# Altium PCB TesisCircuit.PcbDoc
Units mm, origin at the board's own origin, x right, y up, seen from the top; angles counter-clockwise.
Board outline 46.96 x 56.67 mm, 2 copper layers (Top Layer, Bottom Layer); 46 components, 31 nets, 198 pads, 18 vias.
Unrouted connection lines stored in the file: 3.
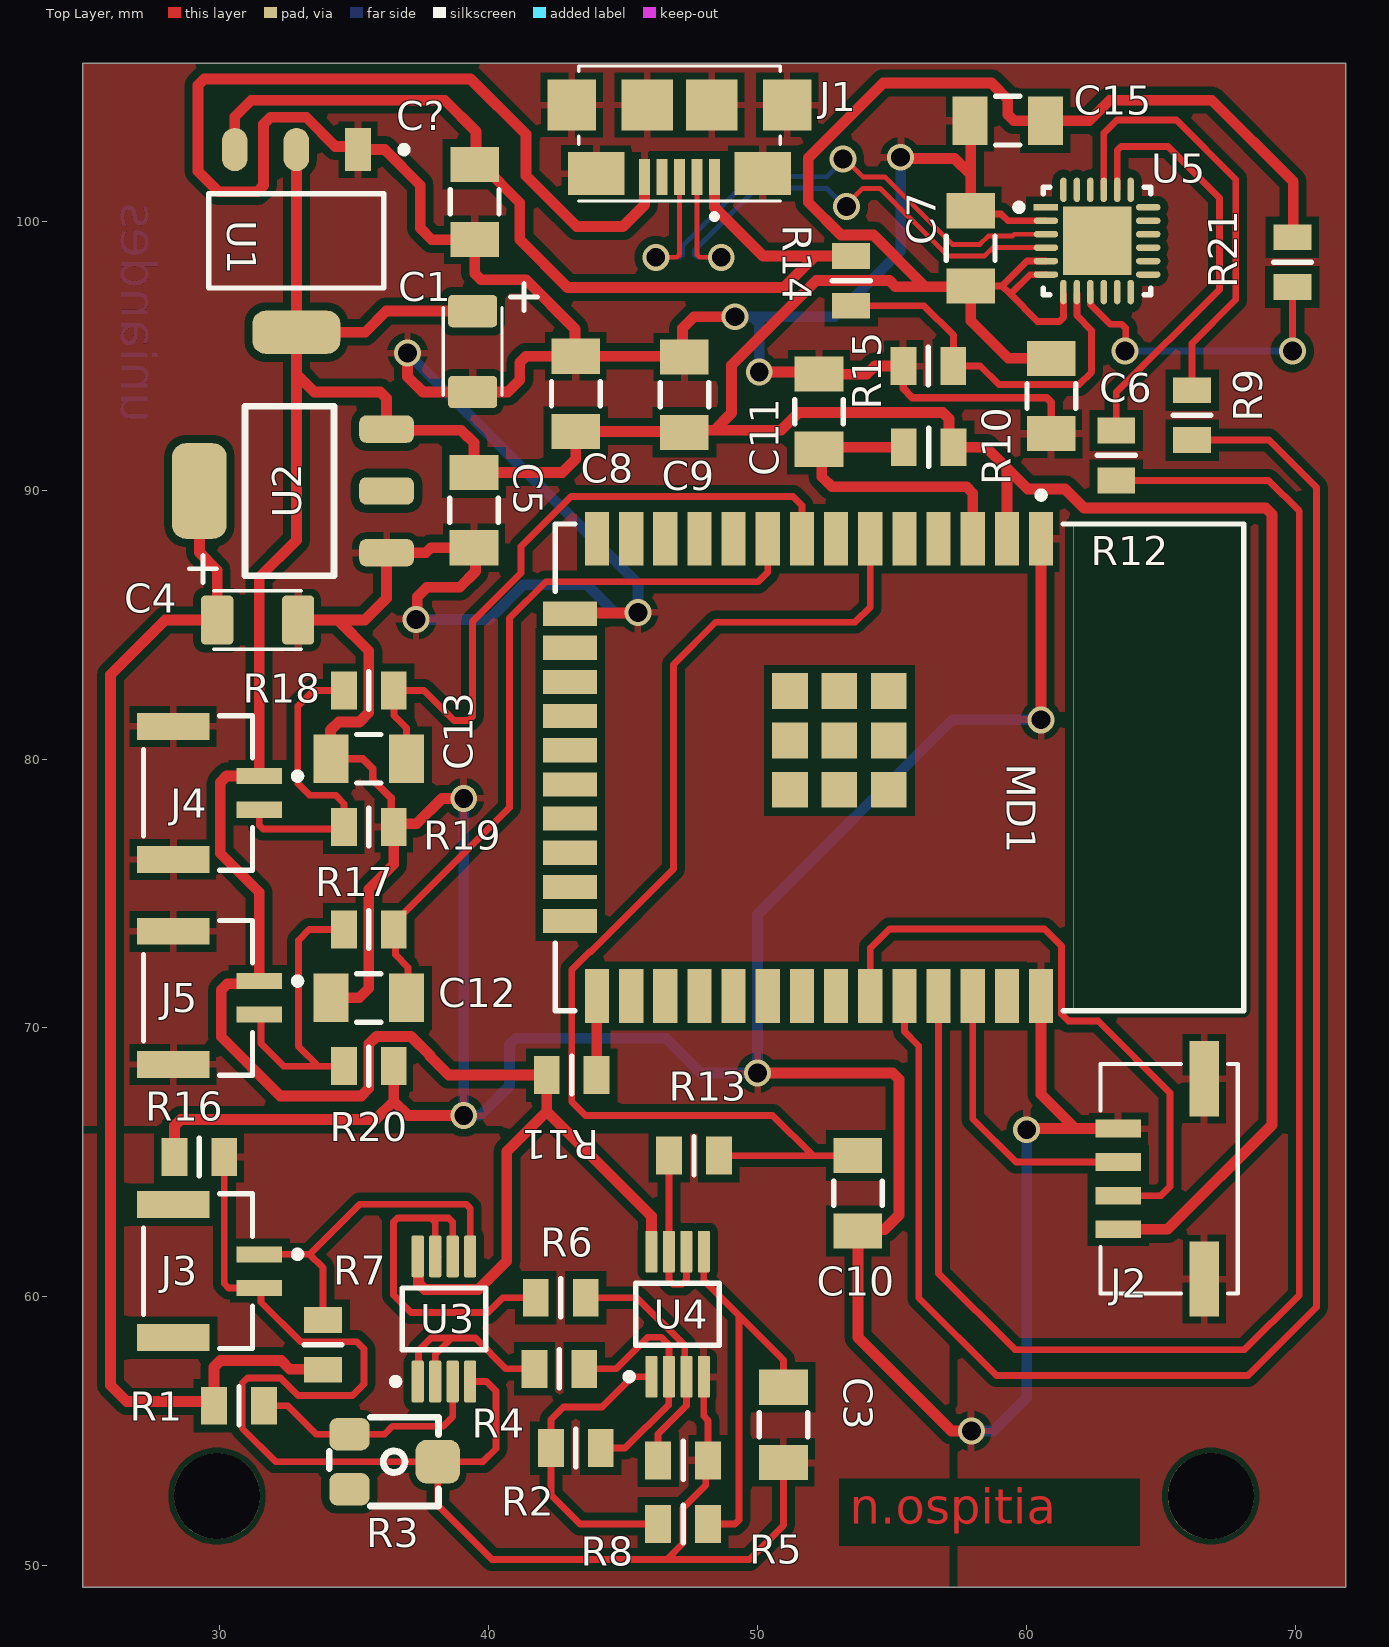
[diagram p0: Top Layer view]
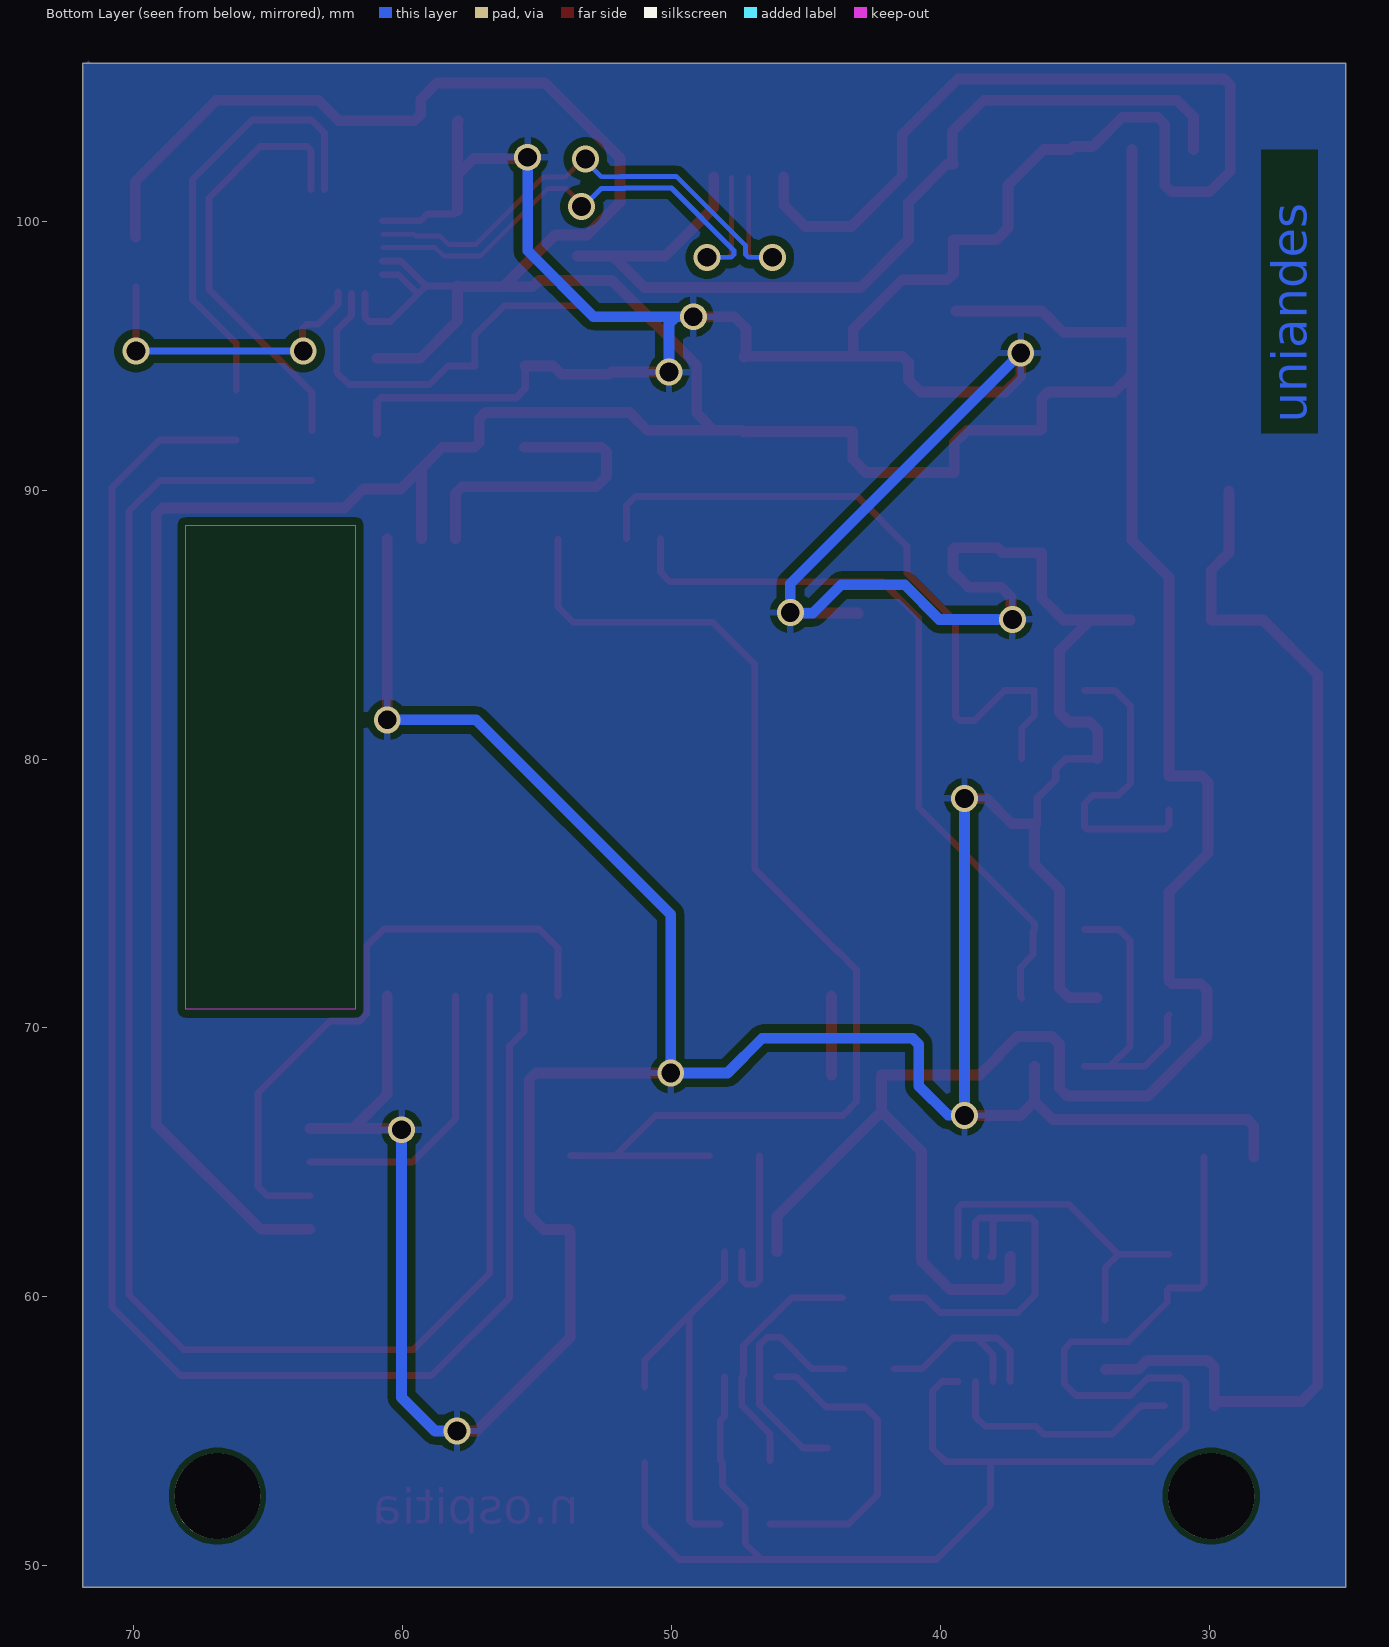
[diagram p1: Bottom Layer view, seen from below]
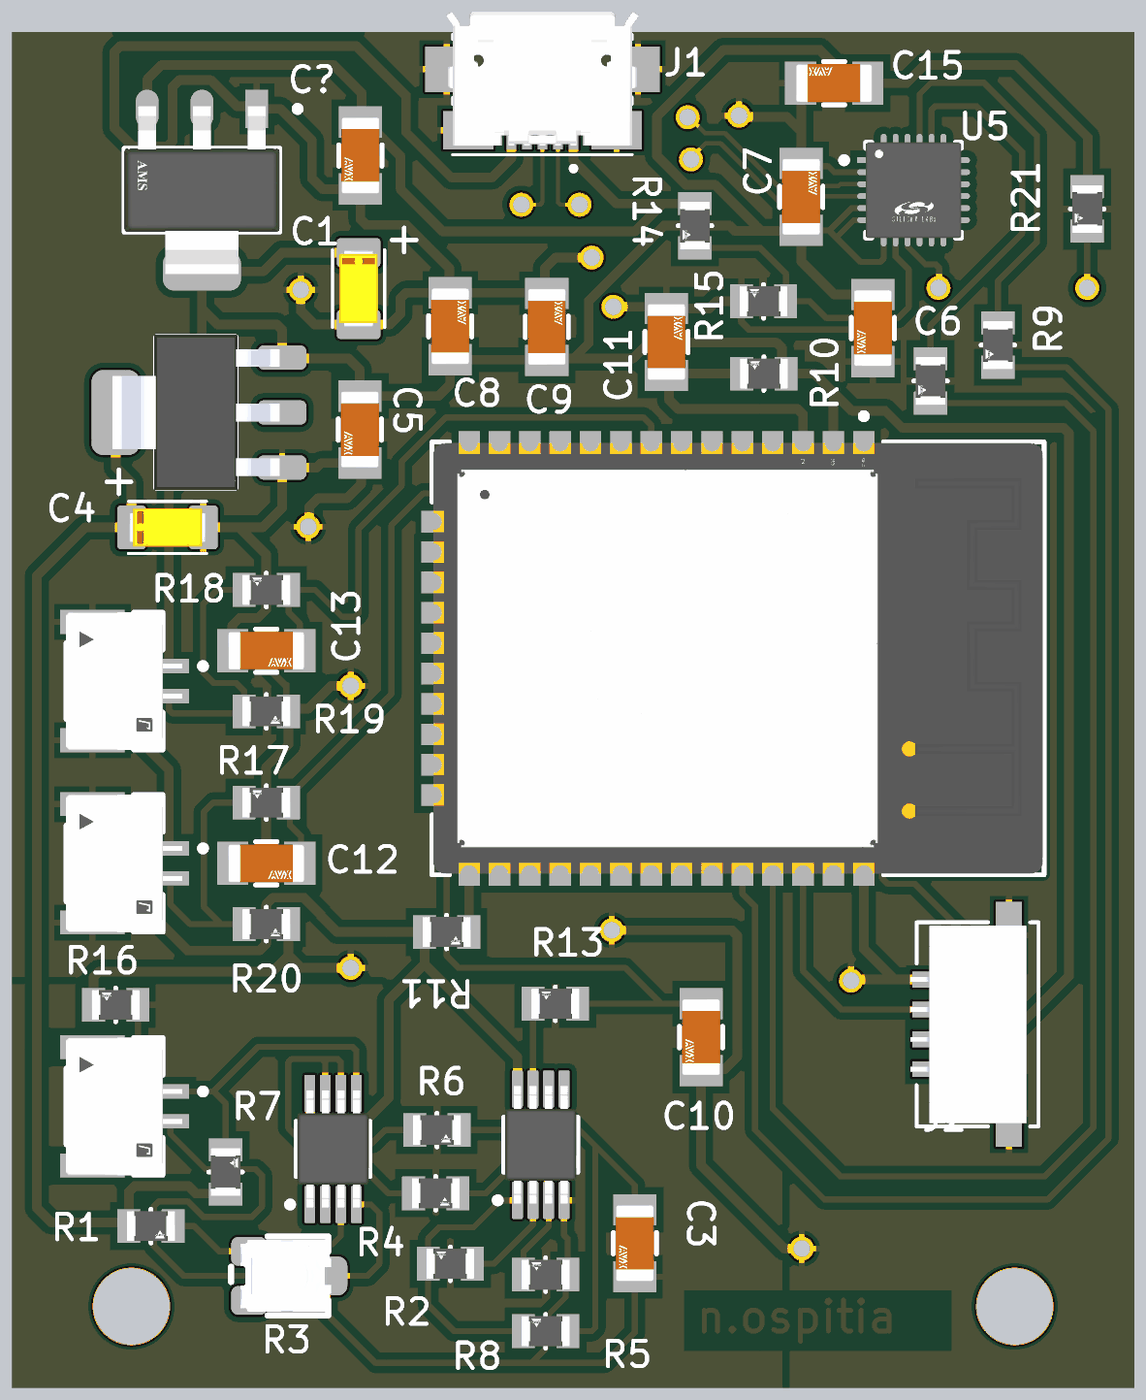
[diagram p2: 3D render of the assembled board from above, using the file's embedded part models]

## Layer stack, top to bottom
Top Solder: solder mask 0.0102, Solder Resist, Dk 3.5
Top Layer: signal copper 0.0356
Dielectric 1: dielectric 0.32, FR-4, Dk 4.8
Bottom Layer: signal copper 0.0356
Bottom Solder: solder mask 0.0102, Solder Resist, Dk 3.5

## Board outline
24.917,49.2 71.882,49.2 71.882,105.867 24.917,105.867

## Design rules (kind name [scope] priority, off if disabled: settings)
Clearance [All] p1: gap=0.2 ignorepadtopadclearanceinfootprint=TRUE except(0.1: Arc-SMDPad Track-SMDPad; 0.15: Arc-Arc Arc-Track Track-Track SMDPad-SMDPad)
DiffPairsRouting [All] p1: maxlimit=0.254 minlimit=0.18 mostfreqgap=0.254 toplayer_minwidth=0.18 toplayer_maxwidth=0.381 toplayer_prefwidth=0.18 bottomlayer_minwidth=0.18 bottomlayer_maxwidth=0.381 bottomlayer_prefwidth=0.18 maxuncoupledlength=12.7
PolygonConnect [All] p1: connectstyle=Relief reliefconductorwidth=0.254 reliefentries=4 polygonreliefangle="90 Angle" airgapwidth=0.254
RoutingVias [All] p1: holewidth=0.711 width=1.27 viastyle="Through Hole" minholewidth=0.15 minwidth=0.5 maxholewidth=0.711 maxwidth=1.27
SolderMaskExpansion [All] p1: expansion=0.102 istentingtop=FALSE
SupplyNets "Schematic Supply Nets_7" [InNet('VDD1.8')] p1: voltage=0.000
SupplyNets "Schematic Supply Nets_6" [InNet('FSR2')] p2: voltage=0.000
SupplyNets "Schematic Supply Nets_5" [InNet('VDD5')] p3: voltage=0.000
SupplyNets "Schematic Supply Nets_4" [InNet('FSR1')] p4: voltage=0.000
SupplyNets "Schematic Supply Nets_3" [InNet('GND')] p5: voltage=0.000
SupplyNets "Schematic Supply Nets_2" [InNet('ANALOG_GND')] p6: voltage=0.000
SupplyNets "Schematic Supply Nets_1" [InNet('VDD3.3')] p7: voltage=0.000
SupplyNets "Schematic Supply Nets" [InNet('EDA+')] p8: voltage=0.000
Width [All] p1: maxlimit=0.4 minlimit=0.18 preferedwidth=0.254
29 further rules are at their usual default settings.

## Classes and differential pairs
differential pair D-/+: +D-/+_P -D-/+_N

## Components (designator, comment, footprint, x,y, rotation, side; value= is the part's Value field where it differs from the comment)
C1 "16V 10uF" "Tantalum Capacitor SMD" 39.421,95.148 r270 top
C3 "0.1uF 10V" FP-1206Q-IPC_B 50.978,55.241 r270 top
C4 "16V 10uF" "Tantalum Capacitor SMD" 31.426,85.166 r0 top
C5 "10uF 10V" FP-1206Q-IPC_B 39.472,89.256 r270 top
C6 "4.7uF 10V" FP-1206Q-IPC_B 60.935,93.497 r270 top
C7 "0.1uF 10V" FP-1206Q-IPC_B 57.937,98.984 r90 top
C8 "22uF 10V" FP-1206Q-IPC_B 43.256,93.574 r90 top
C9 "0.1uF 10V" FP-1206Q-IPC_B 47.295,93.548 r90 top
C10 "0.1uF 10V" FP-1206Q-IPC_B 53.746,63.856 r270 top
C11 "0.1uF 10V" FP-1206Q-IPC_B 52.299,92.917 r90 top
C12 "10uF 10V" FP-1206Q-IPC_B 35.56,71.12 r0 top
C13 "10uF 10V" FP-1206Q-IPC_B 35.56,80.01 r0 top
C15 "0.1uF 10V" FP-1206Q-IPC_B 59.313,103.734 r180 top
C? "10uF 10V" FP-1206Q-IPC_B 39.497,100.711 r270 top
J1 "Micro usb B" "Micro Usb B" 47.111,104.318 r180 top
J2 "JST SMD" "4pin Connector JST-GH" 65.303,64.389 r90 top
J3 "EDA electrodes" FP-SM02B-GHS-TB_LF_SN-MFG 29.21,60.96 r270 top
J4 "FSR force sensor 1" FP-SM02B-GHS-TB_LF_SN-MFG 29.21,78.74 r270 top
J5 "FSR force sensor 2" FP-SM02B-GHS-TB_LF_SN-MFG 29.21,71.12 r270 top
MD1 "ESP32-WROOM-32" FP-ESP32-WROOM-32-MFG 55.294,79.69 r270 top
R1 "200K (1%)" FP-CRCW0805-Ce3-IPC_B 30.734,55.956 r180 top
R2 "200K (1%)" FP-CRCW0805-Ce3-IPC_B 43.256,54.381 r0 top
R3 "SMD trimmer" "SMD trimmer VG039NCHXT" 36.5,53.873 r180 top
R4 "100K (1%)" FP-CRCW0805-Ce3-IPC_B 42.647,57.328 r180 top
R5 "1M (1%)" FP-CRCW0805-Ce3-IPC_B 47.244,51.562 r0 top
R6 "100K (1%)" FP-CRCW0805-Ce3-IPC_B 42.697,59.969 r180 top
R7 "200K (1%)" FP-CRCW0805-Ce3-IPC_B 33.858,58.217 r270 top
R8 "200K (1%)" FP-CRCW0805-Ce3-IPC_B 47.244,53.924 r0 top
R9 "0R (5%)" FP-CRCW0805-Ce3-IPC_B 66.167,92.786 r90 top
R10 "10K (5%)" FP-CRCW0805-Ce3-IPC_B 56.375,91.592 r0 top
R11 "10K (5%)" FP-CRCW0805-Ce3-IPC_B 43.104,68.25 r180 top
R12 "0R (5%)" FP-CRCW0805-Ce3-IPC_B 63.348,91.288 r90 top
R13 "100 (1%)" FP-CRCW0805-Ce3-IPC_B 47.65,65.253 r0 top
R14 "22.1K (5%)" FP-CRCW0805-Ce3-IPC_B 53.492,97.778 r90 top
R15 "47.5K (5%)" FP-CRCW0805-Ce3-IPC_B 56.363,94.615 r0 top
R16 "0R (1%)" FP-CRCW0805-Ce3-IPC_B 29.261,65.202 r0 top
R17 "1K (1%)" FP-CRCW0805-Ce3-IPC_B 35.56,73.66 r0 top
R18 "1K (1%)" FP-CRCW0805-Ce3-IPC_B 35.56,82.55 r0 top
R19 "47K (5%)" FP-CRCW0805-Ce3-IPC_B 35.56,77.47 r180 top
R20 "47K (5%)" FP-CRCW0805-Ce3-IPC_B 35.56,68.58 r180 top
R21 "1K (1%)" FP-CRCW0805-Ce3-IPC_B 69.901,98.476 r90 top
U1 "ams1117-3.3" FP-ams1117-IPC_A 32.868,99.263 r270 top
U2 "1.8 Voltage Regulator" AMS1117-1.8 32.614,89.967 r90 top
U3 "OPA2333 MSOP8" DGK0008A_M 38.354,59.182 r90 top
U4 "OPA2333 MSOP8" DGK0008A_M 47.041,59.36 r90 top
U5 "CP2102N-A02-GQFN24R" FP-CP2102N-A02-GQFN24R-IPC_B 62.636,99.263 r0 top

## Footprints (in the part's own frame and the unit in brackets; to place one, negate y for a bottom-side part, rotate by r counter-clockwise, add the part's x,y. Pads: shape width x height; smd on the part's side, far side on the other; paste and mask are expansions set on the pad)
"4pin Connector JST-GH" [mil] "CONN HEADER SMD R/A 4POS 1.25MM / JST"
  rect 26x67 smd: 1(-73.82,73.85) 2(-24.61,73.85) 3(24.61,73.85) 4(73.82,73.85)
  rect 110x43 smd: MNT1(-146.65,-52.14) MNT2(146.65,-52.14)
  silkscreen extent -168,-101 168,100, body extent -162,-81 162,110, height 167
AMS1117-1.8 [mil] "Voltage Regulator AMS1117 SMD"
  rrect50% 40x80 smd: 1(-90.5,-142) 2(0,-142) 3(90.5,-142)
  rrect50% 140x80 smd: 4(0,132)
  silkscreen extent -124,-65 124,65, body extent -128,-138 128,138, height 71
DGK0008A_M [mm] "TSOP, 8-Leads, Body 3.1x3.1mm, Pitch 0.65mm, IPC Low Density"
  rrect22% 1.55x0.45 smd: 1(-2.325,0.975) 2(-2.325,0.325) 3(-2.325,-0.325) 4(-2.325,-0.975) 5(2.325,-0.975) 6(2.325,-0.325) 7(2.325,0.325) 8(2.325,0.975)
  silkscreen extent -2.45,-1.55 1.15,1.92, body extent -2.45,-1.5 2.45,1.5, height 0.94
FP-1206Q-IPC_B [mm]
  rect 1.305x1.806 smd paste+0 mask+0: 1(-1.401,0) 2(1.401,0)
  silkscreen extent -0.45,-0.9 0.45,0.9, body extent -2.3,-1.15 2.3,1.15, height 0.25
FP-ams1117-IPC_A [mm]
  rect 1.604x0.952 smd paste+0 mask+0: 1(-3.395,2.29)
  rrect100% 1.604x0.952 smd paste+0 mask+0: 2(-3.395,0) 3(-3.395,-2.29)
  rrect59% 1.604x3.262 smd paste+0 mask+0: 4(3.395,0)
  silkscreen extent -3.52,-3.25 1.75,4.13, body extent -4.7,-3.75 4.7,3.75, height 0.25
FP-CP2102N-A02-GQFN24R-IPC_B [mm]
  rect 0.91x0.239 smd paste+0 mask+0: 1(-1.901,1.25)
  rrect100% 0.91x0.239 smd paste+0 mask+0: 2(-1.901,0.75) 3(-1.901,0.25) 4(-1.901,-0.25) 5(-1.901,-0.75) 6(-1.901,-1.25) 13(1.901,-1.25) 14(1.901,-0.75) 15(1.901,-0.25) 16(1.901,0.25) 17(1.901,0.75) 18(1.901,1.25)
  rrect100% 0.239x0.91 smd paste+0 mask+0: 7(-1.25,-1.901) 8(-0.75,-1.901) 9(-0.25,-1.901) 10(0.25,-1.901) 11(0.75,-1.901) 12(1.25,-1.901) 19(1.25,1.901) 20(0.75,1.901) 21(0.25,1.901) 22(-0.25,1.901) 23(-0.75,1.901) 24(-1.25,1.901)
  rect 2.55x2.55 smd paste-1000 mask+0: 25(0,0)
  silkscreen extent -3.03,-2 2,2, body extent -2.61,-2.61 2.61,2.61, height 0.25
FP-CRCW0805-Ce3-IPC_B [mm]
  rect 0.959x1.408 smd paste+0 mask+0: 1(-0.927,0) 2(0.927,0)
  silkscreen extent 0,-0.7 0,0.7, body extent -1.66,-0.95 1.66,0.95, height 0.25
FP-ESP32-WROOM-32-MFG [mm]
  rect 2x0.9 smd paste+0 mask+0: 1(-8.5,5.26) 2(-8.5,3.99) 3(-8.5,2.72) 4(-8.5,1.45) 5(-8.5,0.18) 6(-8.5,-1.09) 7(-8.5,-2.36) 8(-8.5,-3.63) 9(-8.5,-4.9) 10(-8.5,-6.17) 11(-8.5,-7.44) 12(-8.5,-8.71) 13(-8.5,-9.98) 14(-8.5,-11.25) 25(8.5,-11.25) 26(8.5,-9.98) 27(8.5,-8.71) 28(8.5,-7.44) 29(8.5,-6.17) 30(8.5,-4.9) 31(8.5,-3.63) 32(8.5,-2.36) 33(8.5,-1.09) 34(8.5,0.18) 35(8.5,1.45) 36(8.5,2.72) 37(8.5,3.99) 38(8.5,5.26)
  rect 0.9x2 smd paste+0 mask+0: 15(-5.715,-12.25) 16(-4.445,-12.25) 17(-3.175,-12.25) 18(-1.905,-12.25) 19(-0.635,-12.25) 20(0.635,-12.25) 21(1.905,-12.25) 22(3.175,-12.25) 23(4.445,-12.25) 24(5.715,-12.25)
  rect 1.33x1.33 smd paste+0 mask+0: 39(-2.835,-0.405) 39(-2.835,-2.24) 39(-2.835,-4.075) 39(-1,-0.405) 39(-1,-2.24) 39(-1,-4.075) 39(0.835,-0.405) 39(0.835,-2.24) 39(0.835,-4.075)
  Keep-Out Layer region: -9,6.45 9,6.45 9,12.75 -9,12.75
  Keep-Out Layer region: -9,6.45 9,6.45 9,12.75 -9,12.75
  silkscreen extent -10.25,-12.8 9.05,12.8, body extent -9.6,-13.35 9.6,12.9, height 0.25
FP-SM02B-GHS-TB_LF_SN-MFG [mm]
  rect 0.6x1.7 smd paste+0 mask+0: 1(-0.625,2.275) 2(0.625,2.275)
  rect 1x2.7 smd paste+0 mask+0: 3(-2.475,-0.925) 4(2.475,-0.925)
  silkscreen extent -2.88,-2.02 2.87,3.83, body extent -3.08,-2.37 3.08,3.22, height 0.25
"Micro Usb B" [mm] "Surface Mount"
  rect 0.4x1.35 smd: 1(-1.3,2.675) 2(-0.65,2.675) 3(0,2.675) 4(0.65,2.675) 5(1.3,2.675)
  rect 2.1x1.6 smd: SH1(-3.1,2.55) SH6(3.1,2.55)
  rect 1.8x1.9 smd: SH2(-4,0) SH5(4,0)
  rect 1.9x1.9 smd: SH3(-1.2,0) SH4(1.2,0)
  silkscreen extent -3.75,-1.45 3.75,4.25, body extent -4.04,-2.41 4.04,3.19, height 2.91
"SMD trimmer VG039NCHXT" [mil] "VG039NCHXT B503"
  rrect50% 58.9x47.36 smd: 1(65.41,-40.34) 3(65.41,40.34)
  rrect50% 65x64 smd: 2(-63.98,0)
  silkscreen extent -65,-65 95,65, body extent -70,-59 80,59, height 50
"Tantalum Capacitor SMD" [mm] "CASE-A-3216-18 / 10uF 16V"
  rrect25% 1.2x1.82 smd: 1(-1.505,0) 2(1.505,0)
  silkscreen extent -2.54,-1.09 1.63,2.41, body extent -1.6,-0.8 1.6,0.8, height 1.8

## Part data
C1 C4: library part "Tantalum Capacitor SMD", "CASE-A-3216-18 /  / T491A106K016AT"
C3 C5 C6 C7 C8 C9 C10 C11 C12 C13 C15 C?: library part CMP-04427-000069-1, "SMD Package Type 1206", Capacitance=22uF, Case Code (Imperial)=1206, Case Code (Metric)=3216, Dielectric=X7R, Max Operating Temperature=125°C, Min Operating Temperature=-55°C, Package Quantity=2500, Tolerance=10%, Voltage=10V, Case/Package=1206, Construction=Flat, Contact Plating=Tin, Depth=1.6mm, Dissipation Factor=5%, Lead Free="Lead Free", Length=3.2mm, Mount="Surface Mount", Packaging="Cut Tape", REACH SVHC="No SVHC", RoHS Compliant=Yes, Series=-, Termination=SMD/SMT, Thickness=0.071inch, Voltage Rating=10V, Voltage Rating (DC)=10V, Width=0.063inch
J1: library part "Micro Usb connector", "Surface Mount / https://www.snapeda.com/parts/47346-0001/Molex/view-part/"
J2: library part "4pin Connector JST-GH", "CONN HEADER SMD R/A 4POS 1.25MM"
J3 J4 J5: library part CMP-2000-07076-2, "CONN HEADER SMD R/A 2POS 1.25MM", Color=Natural, Current Rating=1A, Package Quantity=2500, Voltage Rating=50V, Connector Type="Outer Shroud Contact", Contact Material=Bronze, Contact Plating=Tin, Contact Type="Male Pin", Fastening Type=Latch, Housing Color=Natural, Housing Material=Nylon, Lead Free="Lead Free", Mount="Surface Mount", Number of Contacts=2, Number of Positions=2, Number of Rows=1, Orientation="Right Angle", Packaging="Tape and Reel", Pitch=0.049inch, Series=GH, Termination=Solder
MD1: library part CMP-194065-000008-1, "RX TXRX MOD WIFI SURFACE MOUNT", Case/Package=SMD/SMT, Frequency=2.5GHz, Max Operating Temperature=85°C, Min Operating Temperature=-40°C, Operating Supply Voltage=3.6V, Package Quantity=550, Data Rate=150Mbps, Mount="Surface Mount", Packaging="Cut Tape", Sensitivity=-98dBm, Weight=0.088185oz
R1 R2 R4 R5 R6 R7 R8 R9 R10 R11 R12 R13 R14 R15 R16 R17 R18 R19 R20 R21: library part CMP-00030-87884303-1, "SMD Package Type 805", Case/Package=0805, Max Operating Temperature=155°C, Min Operating Temperature=-55°C, Power Rating=125mW, Resistance=0Ω, Voltage Rating=150V, Composition="Thick Film", Height=600µm, Lead Free="Lead Free", NexarPartId=87884303, RoHS=Compliant
R3: library part "SMD trimmer VG039NCHXT", "VG039NCHXT B503"
U1: library part CMP-209535-000002-1, "1A LOW DROPOUT VOLTAGE REGULATOR", RoHS Compliant=Yes
U2: library part AMS1117-1.8
U3 U4: library part CMP-0272-01196-3, "17 uA, MicroPower, Precision, Zero Drift CMOS Operational Amplifier, 1.8 to 5.5 V, -40 to 125 degC, 8-pin SOP (DGK8), Green (RoHS & no Sb/Br)", Manufacturer="Texas Instruments", PartNumber=OPA2333AIDGKR, Total Supply Voltage(Max)(+5V is 5, +/-5V is 10)=5.5, Total Supply Voltage(Min)(+5V is 5, +/-5V is 10)=1.8, CMRR(Min)(dB)=106, Code_JEDEC=MO-187, ComponentLink1Description="Manufacturer URL", ComponentLink1URL=http://www.ti.com/, ComponentLink2Description=Datasheet, ComponentLink2URL=http://www.ti.com/general/docs/lit/getliterature.tsp?genericPartNumber=OPA2333&fileType=pdf, ComponentLink3Description="Package Specification", ComponentLink3URL=http://www.ti.com/litv/pdf/mpds028d, DatasheetVersion=SBOS351C, Eco-Plan="Green (RoHS & no Sb/Br)", IIB(Max)(pA)=200, Iq per channel(Max)(mA)=0.025, Mounting Technology="Surface Mount", Number of Channels=2, Offset Drift(Typ)(uV/C)=0.02, PackageDescription="8-Pin Thin Small Outline, Body 3 x 3 mm, Pitch 0.65 mm", PackageReference=DGK0008A, PackageVersion="4073329/E, 05/2006", Slew Rate(Typ)(V/us)=0.16, Sub Family="Low Offset Voltage Amplifier (<=500uV), Low Power Amp (<=500uA), Low Supply Voltage Amplifier (<=2.7V), Precision Amplifier, Zero Drift Precision Amplifier", Vio (25C)(Max)(mV)=0.01
U5: library part CMP-08107-000009-2, "IC USB TO UART BRIDGE QFN24", Ambient Temperature Range High=85°C, Manufacturer Lifecycle Status="FULL PRODUCTION", Max Junction Temperature (Tj)=105°C, Max Supply Voltage=3.6V, Min Operating Temperature=-40°C, Min Supply Voltage=1.71V, Height=800µm, Interface="I2C, RS-485, UART, USB", Lifecycle Status=Production, Max Operating Temperature=85°C, NexarPartId=99772192, Number of Digital IO=4, Schedule B="8542390000, 8542390000"

## Free pads (board coordinates)
  round 3.2 hole 3.2: H1(29.917,52.597) H1(66.868,52.597)

## Via types
v1: diameter 1, hole 0.7, Top Layer to Bottom Layer, 18 vias

## Nets (pads, with @x,y where several pads share a name; then routed paths per layer and width w, separated by ;. In a path a pad name is that pad's centre, name@x,y a point inside that pad or via, vN(x,y) a via of type N, cw(c..) or ccw(c..) an arc to the next point about the centre after c; other vN are vias at no path point)
ANALOG_GND: C3.2 J3.2 R3.2 R8.2 R16.2 U3.4 U4.4 | length 58.3
  Top Layer w0.254: R16.2 30.187,60.491 30.343,60.335 J3.2 31.553,60.267 31.553,59.803 33.019,58.337 35.109,58.337 35.382,58.064 35.382,56.769 34.95,56.337 32.926,56.337 32.276,56.987 31.046,56.987 30.854,56.796 30.854,55.117 32.098,53.873 R3.2 ; U3.4 39.932,56.857 40.284,56.505 40.284,54.356 39.802,53.873 R3.2 ; U4.4 48.016,55.565 48.171,55.411 R8.2 48.086,53.839 48.086,52.988 47.244,52.146 47.244,50.843 46.642,50.241 ; C3.2 50.978,51.511 49.708,50.241 46.642,50.241 ; R3.2 38.125,52.248 40.132,50.241 46.634,50.241 46.642,50.241
D-/+_N: J1.3 U5.3 | length 21.5
  Top Layer w0.18: v1(46.231,98.654) 47.005,98.654 47.111,98.759 J1.3 ; v1(53.188,102.311) 53.257,102.311 53.924,101.643 54.744,101.643 57.255,99.132 58.281,99.132 58.59,99.441 59.491,99.441 59.563,99.513 U5.3
  Bottom Layer w0.18: v1(46.231,98.654) 47.125,98.654 47.23,98.759 47.23,99.088 49.807,101.665 51.883,101.665 51.901,101.646 52.592,101.646 53.188,102.242 v1(53.188,102.311)
D-/+_P: J1.2 U5.4 | length 20.8
  Top Layer w0.18: J1.2 47.761,98.759 47.866,98.654 v1(48.663,98.654) ; v1(53.326,100.548) 53.326,100.617 53.924,101.215 54.567,101.215 57.078,98.704 58.459,98.704 58.767,99.013 U5.4
  Bottom Layer w0.18: v1(48.663,98.654) 47.769,98.654 47.664,98.759 47.664,98.908 49.986,101.231 51.703,101.231 51.721,101.212 52.592,101.212 53.257,100.548 v1(53.326,100.548)
EDA+: J3.1 R7.1 U3.5 | length 13.2
  Top Layer w0.254: J3.1 33.36,61.585 ; R7.1@33.881,59.166 R7.1 33.858,61.087 33.36,61.585 ; U3.5 39.329,63.3 39.18,63.449 35.224,63.449 33.36,61.585
EDA_ADC: C10.1 MD1.6 R13.2 | length 43.5
  Top Layer w0.254: R13.2 52.066,65.253 C10.1@53.496,65.253 ; 52.066,65.256 50.571,66.751 43.612,66.751 43.104,67.259 43.104,72.161 43.778,72.835 43.818,72.835 46.888,75.906 46.888,83.517 48.46,85.088 53.643,85.088 54.204,85.65 MD1.6 ; C10.1@53.496,65.256 C10.1
EDA_OUT: R13.1 U4.6 U4.7 | length 6.5
  Top Layer w0.254: R13.1 46.716,65.245 46.716,60.621 46.865,60.472 47.213,60.472 47.366,60.625 U4.6
FSR1: C13.2 MD1.8 R18.2 | length 25.9
  Top Layer w0.254: C13.2 36.961,81.149 36.496,81.614 36.496,82.54 R18.2 37.606,82.55 38.724,81.432 39.272,81.432 39.421,81.581 39.421,85.115 41.224,86.919 41.224,87.909 43.078,89.764 51.333,89.764 51.664,89.433 MD1.8
FSR2: C12.2 MD1.9 R17.2 | length 27.7
  Top Layer w0.254: C12.2 37.015,71.175 37.015,72.255 36.547,72.724 36.547,73.6 R17.2 36.487,73.885 40.792,78.19 40.792,85.242 42.139,86.589 50.038,86.589 50.394,86.945 MD1.9
GND: C1.2 C4.2 C5.2 C6.2 C7.2 C8.2 C9.2 C10.2 C11.2 C12.1 C13.1 C15.2 C?.2 J1.5 J1.SH1 J1.SH2 J1.SH3 J1.SH4 J1.SH5 J1.SH6 J2.4 J2.MNT1 J2.MNT2 J4.3 J4.4 J5.3 J5.4 MD1.1 MD1.15 MD1.38 R15.1 R16.1 R19.1 R20.1 U1.1 U2.1 U5.2 | length 266.2
  Top Layer w0.254: C7.2 58.06,100.261 59.073,100.261 59.321,100.013 U5.2@60.731,100.013
  Top Layer w0.28: C13.1 35.331,80.01 35.703,79.639 35.703,79.232 36.368,78.567 36.393,78.567 R19.1@36.393,77.563 ; R15.1 55.423,94.602 55.423,93.777 55.766,93.434 60.771,93.434 60.935,93.27 C6.2
  Top Layer w0.4: R16.1 28.334,66.365 28.568,66.599 35.81,66.599 36.487,67.276 ; C4.2 34.417,85.166 ; C12.1 35.204,71.12 35.56,71.476 35.56,75.159 36.487,76.085 R19.1 36.607,77.591 37.332,77.591 38.278,78.537 v1(39.091,78.537) ; C13.1 34.138,80.032 34.138,81.077 34.439,81.379 35.211,81.379 35.56,81.728 35.56,84.023 34.417,85.166 ; R20.1 36.487,67.276 ; v1(37.001,95.095) 37.001,94.216 37.573,93.643 C1.2 40.723,93.643 41.173,94.094 41.173,94.74 41.408,94.974 C8.2 ; v1(37.313,85.192) 37.36,85.239 37.36,86.027 37.719,86.385 38.938,86.385 39.522,86.97 39.522,87.804 C5.2 37.868,87.855 37.681,87.668 U2.1 36.22,85.979 35.408,85.166 34.417,85.166 ; v1(39.091,66.749) 37.014,66.749 36.487,67.276 ; MD1.15 43.065,85.425 45.547,85.425 v1(45.568,85.446) ; J1.5 45.811,100.599 45.009,99.797 43.293,99.797 41.402,101.688 41.402,103.226 39.345,105.283 29.444,105.283 29.21,105.049 29.21,101.854 29.972,101.092 31.408,101.092 31.643,101.326 31.643,103.601 31.902,103.86 33.23,103.86 34.316,102.775 35.041,102.775 U1.1 36.149,102.658 37.471,101.336 37.471,99.739 37.901,99.31 C?.2 39.497,98.05 39.731,97.815 41.402,97.815 43.225,95.992 43.225,95.006 C8.2 ; v1(49.174,96.444) 47.65,96.444 47.219,96.012 47.219,95.025 C9.2 47.269,94.974 C8.2 ; v1(50.013,68.326) 55.036,68.326 55.27,68.092 55.27,63.049 54.731,62.509 53.801,62.509 C10.2 53.746,58.496 57.226,55.016 v1(57.963,55.016) ; v1(50.077,94.386) 52.23,94.386 52.306,94.31 54.077,94.31 54.381,94.615 R15.1 ; v1(55.334,102.375) 55.382,102.327 57.338,102.327 57.937,101.727 ; C15.2 57.937,103.708 57.937,101.727 ; C7.2 57.937,101.727 ; v1(60.02,66.218) 60.066,66.264 61.828,66.264 ; v1(60.554,81.458) MD1.1 ; MD1.38 60.554,67.538 61.828,66.264 ; J2.4 61.828,66.264
  Bottom Layer w0.4: v1@37.001,95.085 45.568,86.518 ; v1(37.313,85.192) 40.03,85.192 41.316,86.477 43.673,86.477 44.729,85.42 45.542,85.42 v1(45.568,85.446) 45.568,86.477 ; v1(39.091,78.537) v1(39.091,66.749) 39.093,66.751 39.7,66.751 40.792,67.843 40.792,69.387 41.027,69.621 46.609,69.621 47.904,68.326 v1(50.013,68.326) 50.013,74.219 57.252,81.458 v1(60.554,81.458) ; v1(49.174,96.444) 49.822,96.444 ; v1(50.077,94.386) 50.077,96.189 49.822,96.444 ; v1(55.334,102.375) 55.334,98.895 52.883,96.444 49.822,96.444 ; v1(57.963,55.016) 58.776,55.016 60.02,56.261 v1(60.02,66.218)
NetC3_1: C3.1 R5.2 U4.5 | length 15.1
  Top Layer w0.254: U4.5 48.016,60.62 49.327,59.309 ; R5.2 49.178,51.562 49.327,51.711 49.327,59.309 ; C3.1 50.978,57.658 49.327,59.309
NetC11_1: C11.1 MD1.3 R10.1 | length 11.6
  Top Layer w0.4: R10.1 52.582,91.592 52.402,91.413 52.402,90.498 52.781,90.119 57.78,90.119 58.014,89.885 MD1.3
NetJ4_2: J4.2 R18.1 R19.2 | length 11.5
  Top Layer w0.254: J4.2 31.485,77.543 31.634,77.394 34.557,77.394 R19.2 34.633,78.337 34.316,78.654 33.36,78.654 32.918,79.096 32.918,81.966 33.503,82.55 R18.1
NetJ5_2: J5.2 R17.1 R20.2 | length 11.4
  Top Layer w0.254: J5.2 31.547,70.433 31.547,69.418 32.385,68.58 33.68,68.58 ; R20.2 33.68,68.58 ; R17.1 33.344,73.66 32.944,73.26 32.944,69.317 33.68,68.58
NetMD1_25: MD1.25 R11.1 | length 2.9
  Top Layer w0.4: R11.1 44.037,68.257 44.037,71.183 MD1.25
NetR1_1: R1.1 R3.1 U3.3 | length 9
  Top Layer w0.254: R1.1 32.537,55.956 33.596,54.898 R3.1 36.153,54.898 36.449,55.194 38.329,55.194 38.679,55.545 U3.3
NetR2_1: R2.1 R5.1 U4.1 | length 11.6
  Top Layer w0.254: U4.1 45.363,57.035 44.234,55.905 42.799,55.905 42.33,55.436 R2.1 42.33,52.641 43.409,51.562 R5.1
NetR2_2: R2.2 R4.1 U4.2 | length 9.2
  Top Layer w0.254: R4.1 44.757,57.328 45.933,58.504 46.423,58.504 46.716,58.212 U4.2 46.713,57.032 46.713,56.004 45.091,54.381 R2.2
NetR4_2: R4.2 U3.1 U3.2 | length 8
  Top Layer w0.254: U3.1 37.404,56.882 37.404,58.004 37.871,58.471 38.644,58.471 ; U3.2 38.03,56.858 38.03,57.857 38.644,58.471 ; R4.2 40.665,57.328 39.522,58.471 38.644,58.471
NetR6_1: R6.1 R8.1 U4.3 | length 9.1
  Top Layer w0.254: R6.1 45.529,59.969 47.308,58.191 47.308,57.093 47.371,57.03 47.371,55.956 46.317,54.903 R8.1
NetR6_2: R6.2 U3.6 U3.7 | length 14.2
  Top Layer w0.254: U3.7 U3.7@38.029,62.057 ; U3.7@38.127,61.507 38.029,61.605 U3.7@38.029,62.057 ; U3.6 38.679,62.792 38.53,62.941 37.88,62.941 ; R6.2 40.538,59.969 39.994,59.425 37.121,59.425 36.474,60.071 36.474,62.792 36.623,62.941 37.88,62.941 ; 37.88,62.941 38.029,62.792 U3.7@38.029,62.057
NetR21_1: R21.1 U5.9 | length 11.6
  Top Layer w0.254: U5.9 62.386,96.907 63.129,96.164 63.557,96.164 63.706,96.016 63.706,95.202 v1(63.678,95.174) ; v1(69.901,95.174) R21.1
  Bottom Layer w0.254: v1(63.678,95.174) v1(69.901,95.174)
RXD: R12.2 U5.20 | length 16.3
  Top Layer w0.254: R12.2 63.348,93.624 67.183,97.46 67.183,100.863 65.278,102.768 63.535,102.768 63.386,102.62 U5.20
RXD0: MD1.34 R9.1 | length 64.3
  Top Layer w0.254: MD1.34 55.474,69.864 56.007,69.332 56.007,59.969 58.903,57.074 68.246,57.074 70.79,59.618 70.79,90.094 69.024,91.86 R9.1
SCL: J2.3 MD1.36 | length 10.6
  Top Layer w0.254: MD1.36 58.014,66.623 59.624,65.014 J2.3
SDA: J2.2 MD1.33 | length 22.8
  Top Layer w0.254: MD1.33 54.204,72.975 54.915,73.685 60.681,73.685 61.317,73.049 61.317,70.513 61.568,70.263 62.681,70.263 65.354,67.589 65.354,64.098 65.02,63.764 J2.2
TXD: R9.2 U5.21 | length 16.6
  Top Layer w0.254: U5.21 62.886,103.272 63.373,103.759 65.583,103.759 67.793,101.549 67.793,97.079 66.167,95.453 R9.2
TXD0: MD1.35 R12.1 | length 62.2
  Top Layer w0.254: MD1.35 56.744,60.871 59.577,58.039 68.12,58.039 70.155,60.073 70.155,89.213 69.007,90.361 R12.1
VBUS: R14.1 R15.2 U5.8 | length 14.2
  Top Layer w0.254: R14.1 56.208,96.851 57.301,95.758 57.301,94.627 R15.2 58.293,94.615 58.989,93.919 61.973,93.919 62.433,94.379 62.433,95.939 61.886,96.486 U5.8@61.886,97.313
VDD1.8: C4.1 R1.2 R7.2 U2.2 U2.4 | length 46.2
  Top Layer w0.4: U2.4 29.261,89.689 29.261,87.681 29.921,87.02 C4.1 27.991,85.166 25.959,83.134 25.959,56.718 26.563,56.114 29.649,56.114 R1.2 29.807,56.114 29.807,57.398 30.042,57.633 32.305,57.633 32.622,57.316 33.833,57.316 R7.2
VDD3.3: C1.1 C5.1 C6.1 C7.1 C8.1 C9.1 C15.1 J2.1 J4.1 J5.1 MD1.2 R10.2 R11.2 R21.2 U1.2 U1.4 U2.3 U3.8 U4.8 U5.5 U5.6 U5.7 | length 211.1
  Top Layer w0.254: C7.1 59.11,97.583 ; U5.6 60.728,98.006 60.134,98.006 59.411,97.282 ; U5.5 60.04,98.513 59.11,97.583 ; U5.7@61.386,97.313 61.386,96.415 61.238,96.266 60.427,96.266 59.411,97.282 ; 59.11,97.583 59.411,97.282
  Top Layer w0.4: U1.2 U1.4 ; U3.8 37.404,61.482 37.404,60.509 37.638,60.274 39.633,60.274 40.691,61.332 40.691,65.405 42.177,66.891 ; C1.1 36.21,96.653 35.424,95.868 U1.4 ; U4.8 46.066,63.003 42.177,66.891 ; MD1.2 59.284,90.814 ; C6.1 59.331,94.898 57.937,96.291 C7.1 57.916,97.561 56.159,97.561 ; J2.1 65.257,62.514 69.139,66.396 69.139,89.097 68.904,89.332 62.154,89.332 61.443,90.043 60.056,90.043 59.284,90.814 ; R21.2 69.926,99.428 69.926,101.473 66.904,104.496 63.111,104.496 62.349,103.734 59.547,103.734 59.313,103.968 59.313,104.534 58.716,105.131 54.686,105.131 51.901,102.345 51.901,100.7 53.117,99.484 54.321,99.484 56.159,97.645 56.159,97.561 ; 32.868,94.31 32.868,88.138 31.485,86.755 J4.1 30.269,79.365 30.035,79.131 30.035,76.493 31.485,75.043 J5.1 31.385,71.645 30.308,71.645 30.074,71.411 30.074,69.672 32.27,67.476 35.278,67.476 35.56,67.758 35.56,69.402 35.842,69.684 37.132,69.684 37.832,68.984 37.832,68.95 38.532,68.25 R11.2 42.177,66.891 ; 32.868,94.31 33.528,93.65 35.986,93.65 36.22,93.416 U2.3 36.258,92.227 38.989,92.227 39.223,91.993 39.237,91.993 39.472,91.759 C5.1 42.752,90.656 43.25,91.155 43.25,92.167 C8.1 47.269,92.173 C9.1 47.373,92.226 48.411,92.226 ; 32.868,94.31 U1.4 ; 48.411,92.226 49.047,92.862 49.047,94.64 52.196,97.789 54.916,97.789 55.143,97.561 56.159,97.561 ; 48.411,92.226 50.887,92.226 51.549,92.888 56.896,92.888 57.131,92.654 57.131,91.763 R10.2 58.507,91.592 59.284,90.814
VDD5: C?.1 J1.1 R14.2 U1.3 | length 35
  Top Layer w0.4: U1.3 30.578,103.882 31.191,104.496 38.379,104.496 39.548,103.327 39.548,102.163 C?.1 39.748,102.112 41.173,100.686 41.173,99.314 42.951,97.536 50.992,97.536 52.16,98.704 ; J1.1 48.411,100.509 50.216,98.704 52.16,98.704 ; R14.2 52.16,98.704
pads on no net: J1.4 J3.3 J3.4 MD1.4 MD1.5 MD1.7 MD1.10 MD1.11 MD1.12 MD1.13 MD1.14 MD1.16 MD1.17 MD1.18 MD1.19 MD1.20 MD1.21 MD1.22 MD1.23 MD1.24 MD1.26 MD1.27 MD1.28 MD1.29 MD1.30 MD1.31 MD1.32 MD1.37 MD1.39 R3.3 U5.1 U5.10 U5.11 U5.12 U5.13 U5.14 U5.15 U5.16 U5.17 U5.18 U5.19 U5.22 U5.23 U5.24 U5.25

## Polygon pours and split planes (outlines as drawn)
GND on Top Layer "GND_L01_P002" (solid, pour order 2): 71.882,49.2 71.882,105.867 24.917,105.867 24.917,49.2
ANALOG_GND on Top Layer "ANALOG_GND_L01_P001" (solid, pour order 1): 24.917,66.065 57.15,66.065 57.15,49.2 24.917,49.2
GND on Bottom Layer "GND_L02_P003" (solid, pour order 3): 24.917,105.867 71.577,105.867 71.679,105.969 71.882,105.766 71.882,49.2 24.917,49.2

## Other copper
Top Layer:
  text "n.ospitia" at 53.438,51.56 h1.3
Bottom Layer:
  text "uniandes" at 26.362,92.504 h1.3 r270